# Altium PCB 转接板.PcbDoc
Units mil, origin at the board's own origin, x right, y up, seen from the top; angles counter-clockwise.
Board outline 2519.69 x 2440.94 mil, 2 copper layers (Top Layer, Bottom Layer); 36 components, 45 nets, 130 pads, 10 vias.
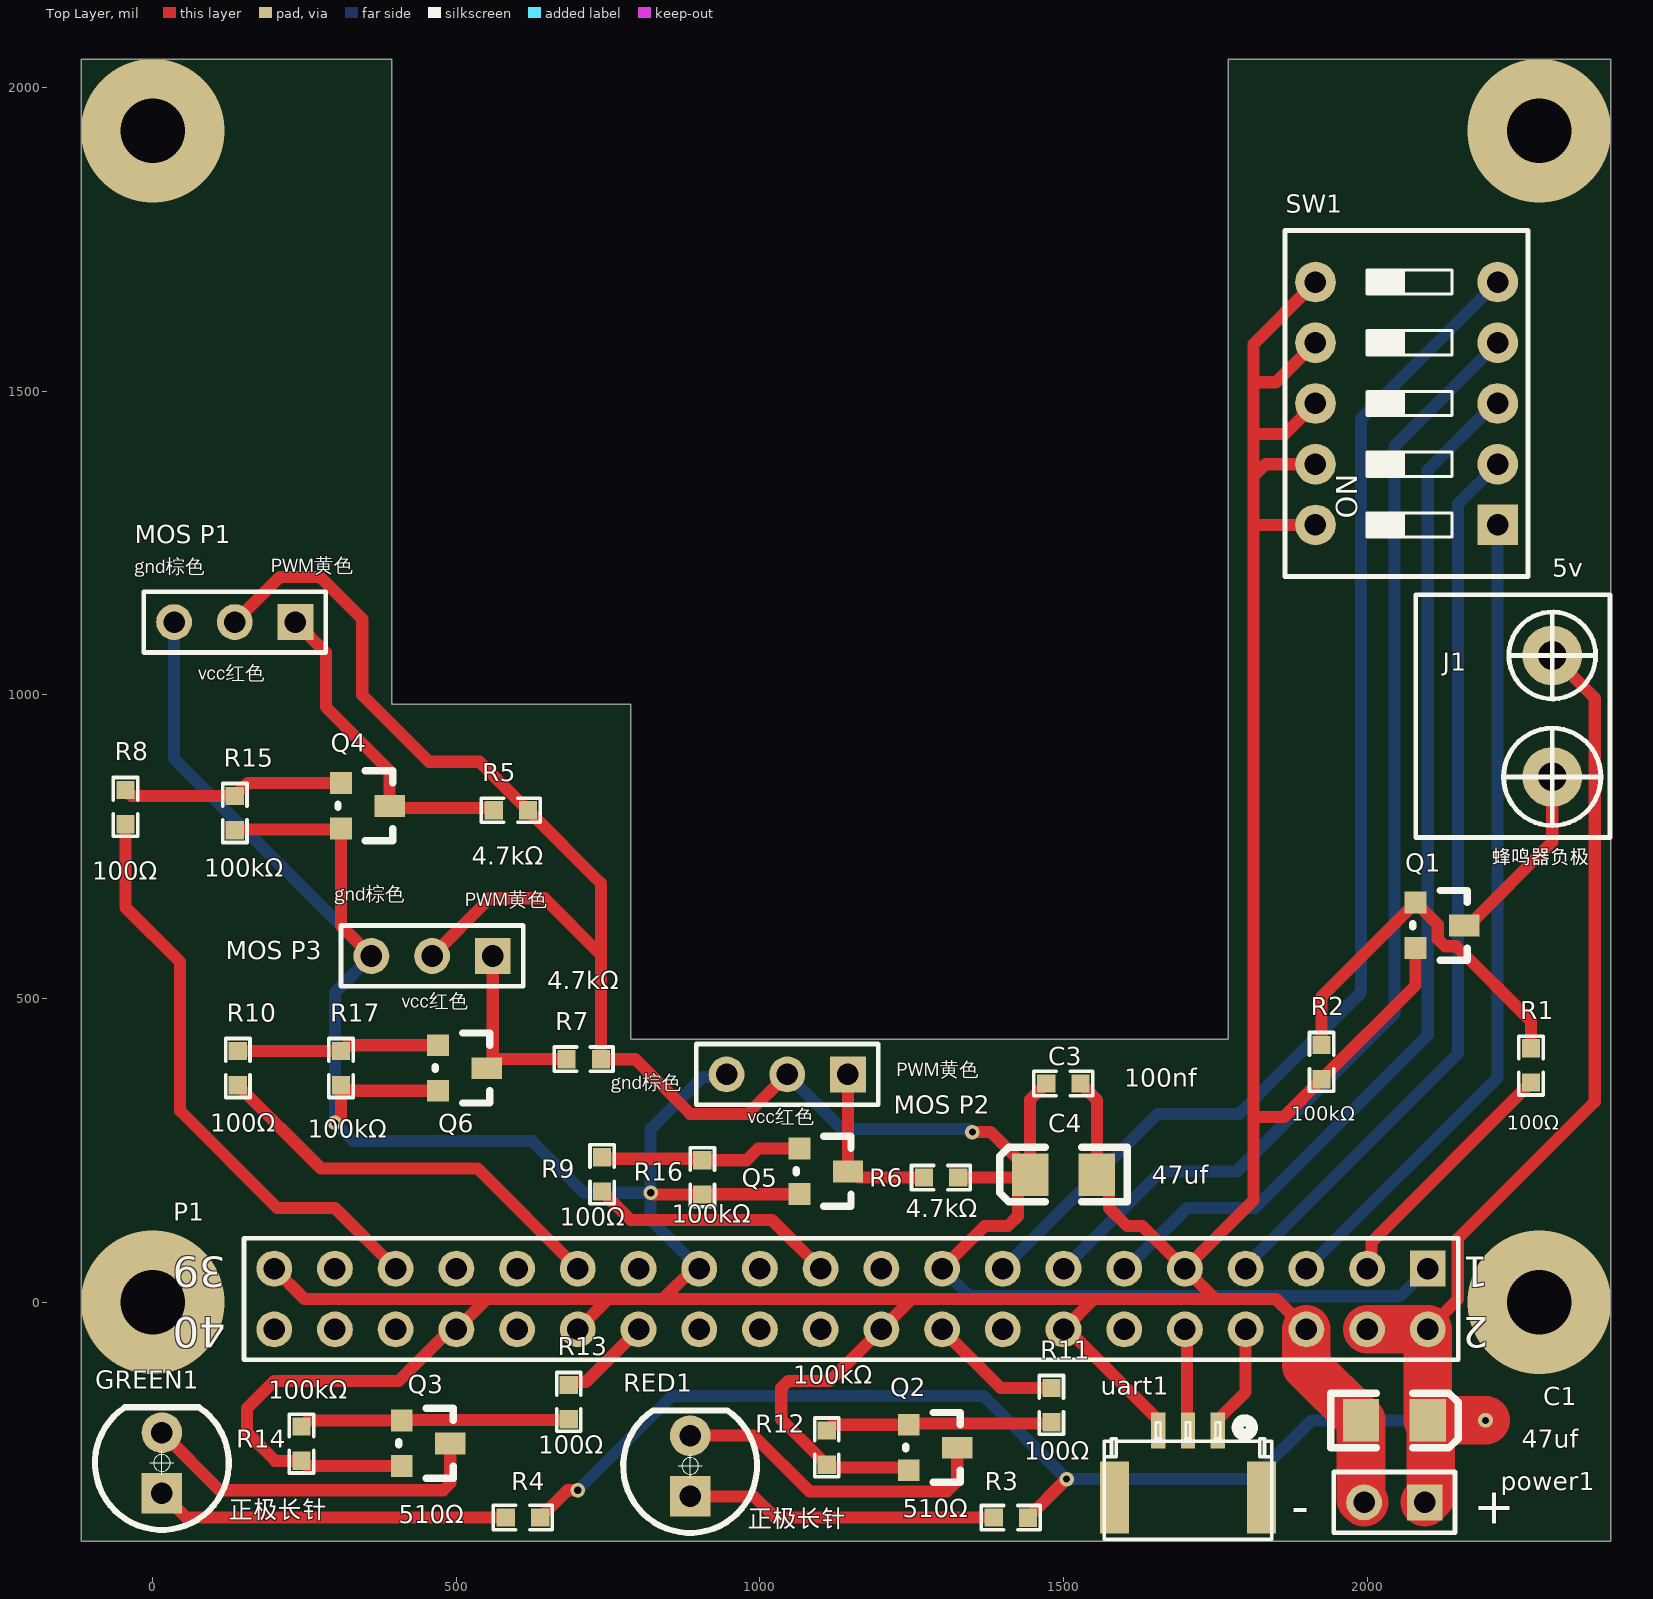
[diagram p0: Top Layer view]
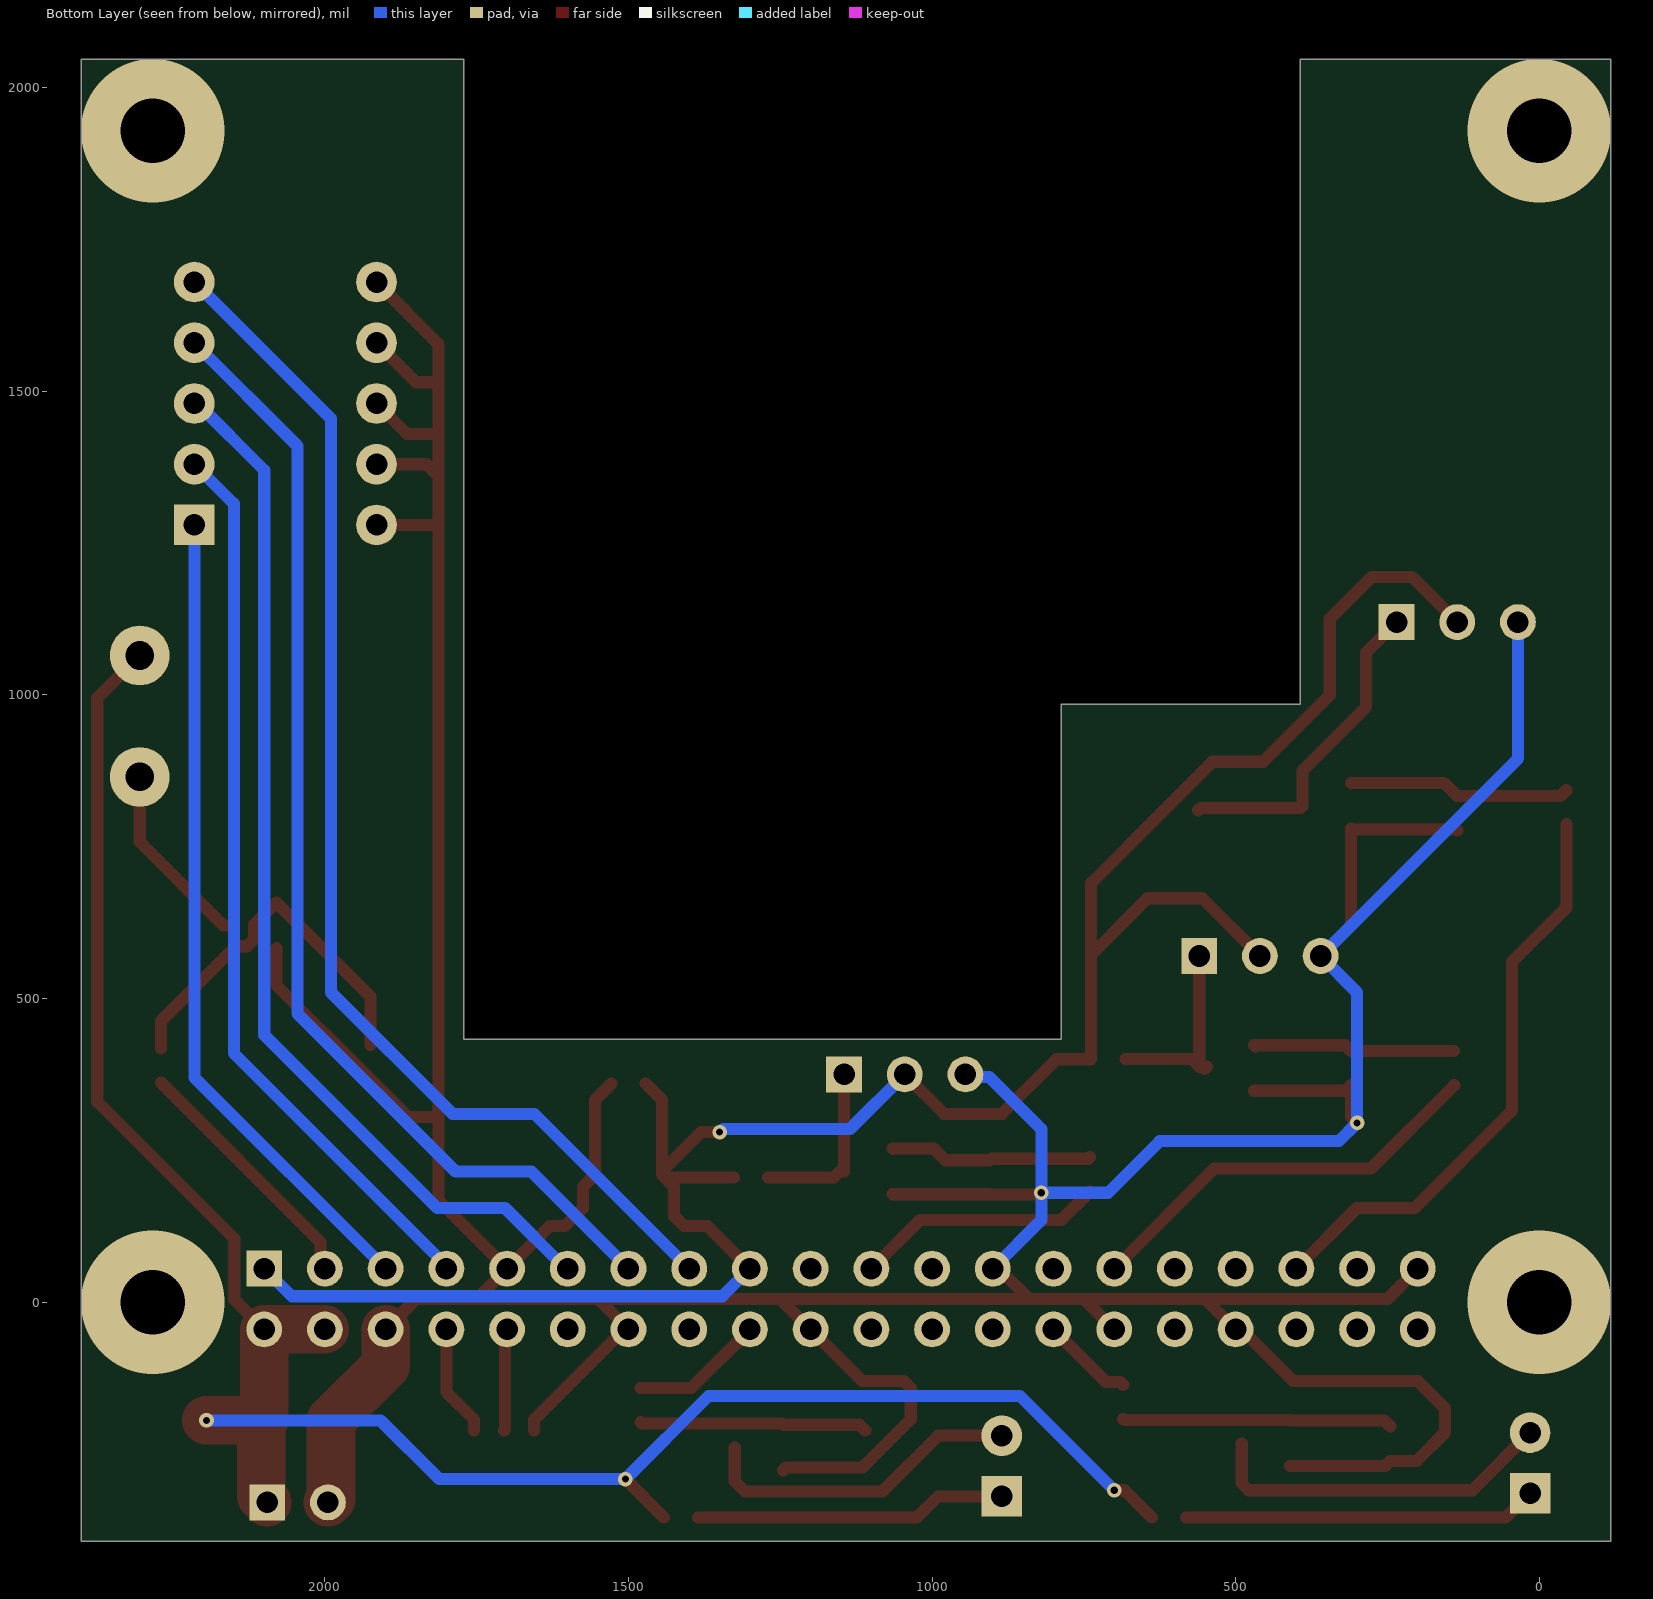
[diagram p1: Bottom Layer view, seen from below]

## Layer stack, top to bottom
Top Solder: solder mask 0.4, Solder Resist, Dk 3.5
Top Layer: signal copper 1.4
Dielectric 1: dielectric 12.6, FR-4, Dk 4.8
Bottom Layer: signal copper 1.4
Bottom Solder: solder mask 0.4, Solder Resist, Dk 3.5

## Board outline
-118.11,-393.7 -118.11,2047.24 393.7,2047.24 393.7,984.25 787.4,984.25 787.4,433.07 1771.65,433.07 1771.65,2047.24 2401.57,2047.24 2401.57,-393.7

## Design rules (kind name [scope] priority, off if disabled: settings)
Clearance [All] p1: gap=6 ignorepadtopadclearanceinfootprint=TRUE
PolygonConnect [All] p1: connectstyle=Relief reliefconductorwidth=10 reliefentries=4 polygonreliefangle="90 Angle" airgapwidth=10
RoutingVias [All] p1: holewidth=12 width=24 viastyle="Through Hole" minholewidth=12 minwidth=24 maxholewidth=12 maxwidth=24
SolderMaskExpansion [All] p1: expansion=4 istentingtop=FALSE
Width [All] p1: maxlimit=80 minlimit=10 preferedwidth=20
30 further rules are at their usual default settings.

## Components (designator, comment, footprint, x,y, rotation, side; value= is the part's Value field where it differs from the comment)
C1 "47uF" 3216 2060,-195 r0 top
C3 "100nF" 0603P 1500,360 r180 top
C4 "47uF" 3216 1485,210 r180 top
GREEN1 "LED?" "LED 5MM-G" 15,-265 r90 top
J1 "SIP-2" 5.08接线端子2P 2305,1065 r270 top
"MOS P1" "Header 3" HDR1X3 235,1120 r180 top
"MOS P2" "Header 3" HDR1X3 1145,375 r180 top
"MOS P3" "Header 3" HDR1X3 560,570 r180 top
P1 "Header 20X2" HDR2X20 2100,55 r180 top
power1 "Battery" HDR1X2 2095,-330 r180 top
Q1 "SI2302 SOT23" SOT-23 2080,658 r270 top
Q2 "SI2302 SOT23" SOT-23 1245,-202 r270 top
Q3 "SI2302 SOT23" SOT-23 410,-195 r270 top
Q4 "SI2302 SOT23" SOT-23 310,855 r270 top
Q5 "SI2302 SOT23" SOT-23 1065,253 r270 top
Q6 "SI2302 SOT23" SOT-23 470,423 r270 top
R1 "100R" 0603P 2270,390 r270 top
R2 "100K" 0603P 1925,395 r90 top
R3 "510R" 0603P 1413.5,-355.06 r180 top
R4 "510R" 0603P 610,-355 r180 top
R5 "4.7k" 0603P 590,810 r180 top
R6 "4.7k" 0603P 1298.5,204.94 r180 top
R7 "4.7k" 0603P 710,400 r180 top
R8 "100R" 0603P -45,815 r90 top
R9 "100R" 0603P 740,210 r90 top
R10 "100R" 0603P 140,385 r90 top
R11 "100R" 0603P 1480,-170 r90 top
R12 "100K" 0603P 1110,-240 r90 top
R13 "100R" 0603P 685,-165 r90 top
R14 "100K" 0603P 244.94,-233.5 r90 top
R15 "100K" 0603P 135,805 r90 top
R16 "100K" 0603P 905,205 r90 top
R17 "100K" 0603P 310,385 r90 top
RED1 "LED?" "LED 5MM-R" 885,-270 r90 top
SW1 "5P" 拨码开关DIP-5P_G 2065,1480 r90 top
uart1 "Header 3" GH1.25-LS-3P 1705,-310 r0 top

## Footprints (in the part's own frame and the unit in brackets; to place one, negate y for a bottom-side part, rotate by r counter-clockwise, add the part's x,y. Pads: shape width x height; smd on the part's side, far side on the other; paste and mask are expansions set on the pad)
5.08接线端子2P [mm]
  round 2.5 hole 1.2: 1(0,0) 2(5.08,0)
  silkscreen extent -2.54,-5.72 7.62,2.41, body extent -2.46,-5.59 7.54,2.41, height 11
0603P [mil]
  rect 30x30 smd: 1(-28,0) 2(28.5,-0.06)
  silkscreen extent -48,-20 49,20
3216 [mil]
  rect 60x70 smd: 1(40,0) 2(-70,0)
  silkscreen extent -120,-45 90,45
GH1.25-LS-3P [mm] "A1257WR-S-3P"
  rect 1.2x3 smd: 0(-3.075,-0.3) 0(3.075,-0.3)
  rect 0.6x1.5 smd: 1(1.25,2.5) 2(0,2.5) 3(-1.25,2.5)
  silkscreen extent -3.5,-2.05 3.5,2.93, body extent -3.5,-2.15 3.5,2.25, height 4.2
HDR1X2 [mm] "Connector; Header; 2 Position"
  rect 1.5x1.5 hole 0.9: 1(0,0)
  round 1.5 hole 0.9: 2(2.54,0)
  silkscreen extent -1.27,-1.27 3.81,1.27
HDR1X3 [mm] "Connector; Header; 3 Position"
  rect 1.5x1.5 hole 0.9: 1(0,0)
  round 1.5 hole 0.9: 2(2.54,0) 3(5.08,0)
  silkscreen extent -1.27,-1.27 6.35,1.27
HDR2X20 [mm] "Connector; Header; 20x2 Position"
  rect 1.5x1.5 hole 0.9: 1(0,0)
  round 1.5 hole 0.9: 2(0,2.54) 3(2.54,0) 4(2.54,2.54) 5(5.08,0) 6(5.08,2.54) 7(7.62,0) 8(7.62,2.54) 9(10.16,0) 10(10.16,2.54) 11(12.7,0) 12(12.7,2.54) 13(15.24,0) 14(15.24,2.54) 15(17.78,0) 16(17.78,2.54) 17(20.32,0) 18(20.32,2.54) 19(22.86,0) 20(22.86,2.54) 21(25.4,0) 22(25.4,2.54) 23(27.94,0) 24(27.94,2.54) 25(30.48,0) 26(30.48,2.54) 27(33.02,0) 28(33.02,2.54) 29(35.56,0) 30(35.56,2.54) 31(38.1,0) 32(38.1,2.54) 33(40.64,0) 34(40.64,2.54) 35(43.18,0) 36(43.18,2.54) 37(45.72,0) 38(45.72,2.54) 39(48.26,0) 40(48.26,2.54)
  silkscreen extent -1.27,-1.27 49.53,3.81
"LED 5MM-G" [mm] "绿色5mm直插LED"
  rect 1.7x1.7 hole 0.9: 1(-1.27,0)
  round 1.7 hole 0.9: 2(1.27,0)
  silkscreen extent -2.8,-2.8 2.33,2.8, body extent -2.85,-2.85 2.45,2.85, height 8.75
"LED 5MM-R" [mm] "红色5mm直插LED"
  rect 1.7x1.7 hole 0.9: 1(-1.27,0)
  round 1.7 hole 0.9: 2(1.27,0)
  silkscreen extent -2.8,-2.8 2.33,2.8, body extent -2.85,-2.85 2.45,2.85, height 8.75
SOT-23 [mil]
  rect 36x36 smd: 1(0,0) 2(75,0)
  rect 36x50 smd: 3(38,80)
  silkscreen extent -20,-5 95,85
拨码开关DIP-5P_G [mm] "14.2*9.9*7mm"
  rect 1.7x1.7 hole 0.9: 1(-5.08,-3.81)
  round 1.7 hole 0.9: 2(-2.54,-3.81) 3(0,-3.81) 4(2.54,-3.81) 5(5.08,-3.81) 6(5.08,3.81) 7(2.54,3.81) 8(0,3.81) 9(-2.54,3.81) 10(-5.08,3.81)
  silkscreen extent -7.24,-5.08 7.24,5.08, body extent -7.13,-4.95 7.13,4.95, height 6.65

## Part data
C1 C4: library part CAP
C3: library part C
GREEN1 RED1: library part LED
"MOS P1" "MOS P2" "MOS P3" uart1: "Header, 3-Pin", LatestRevisionDate=17-Jul-2002, LatestRevisionNote="Re-released for DXP Platform.", Publisher="Altium Limited"
P1: "Header, 20-Pin, Dual row", LatestRevisionDate=17-Jul-2002, LatestRevisionNote="Re-released for DXP Platform.", Publisher="Altium Limited"
power1: library part "Header 2", "Header, 2-Pin", LatestRevisionDate=17-Jul-2002, LatestRevisionNote="Re-released for DXP Platform.", Publisher="Altium Limited"
Q1 Q2 Q3 Q4 Q5 Q6: library part NMOS
R1 R2 R3 R4 R5 R6 R7 R8 R9 R10 R11 R12 R13 R14 R15 R16 R17: library part R
SW1: library part 拨码开关5P

## Via types
v1: diameter 24, hole 12, Top Layer to Bottom Layer, tented both sides, 6 vias
v2: diameter 236.22, hole 106.3, Top Layer to Bottom Layer, tented both sides, 4 vias

## Nets (pads, with @x,y where several pads share a name; then routed paths per layer and width w, separated by ;. In a path a pad name is that pad's centre, name@x,y a point inside that pad or via, vN(x,y) a via of type N, cw(c..) or ccw(c..) an arc to the next point about the centre after c; other vN are vias at no path point)
+3V3: "MOS P1.2" "MOS P2.2" "MOS P3.2" C3.2 C4.1 P1.1 P1.17 R5.1 R6.1 R7.1 | length 3748.8
  Top Layer w20: 135,1120 209.22,1194.22 275.78,1194.22 345,1125 345,1000 455,890 538,890 R5.1 738,690 738,572 ; 460,570 555,665 645,665 738,572 ; 1045,375 980,310 885,310 795,400 R7.1 738,572 ; P1.17 1370,125 1408.28,125 1425,141.72 1425,190 C4.1@1439.94,204.94 ; R6.1 C4.1@1439.94,204.94 ; v1(1350,280) 1380,280 C4.1@1445,215 ; C3.2 1445,333.56 C4.1@1445,215 ; C4.1@1439.94,204.94 C4.1 C4.1@1445,215
  Bottom Layer w20: 1045,375 1135,285 1343.92,285 1348.92,280 v1(1350,280) ; P1.17 1345.53,9.47 2054.47,9.47 P1.1
+5V: C1.1 J1.1 P1.2 P1.4 power1.1 R3.1 R4.1 | length 3565.4
  Top Layer w20: R4.1 683,-310 v1(700,-310) ; R3.1 v1(1505,-291.56) ; P1.2 2149.35,4.35 2149.35,104.35 2375,330 2375,995 J1.1
  Top Layer w80: P1.4 P1.2 C1.1 ; power1.1 2105,-320 2105,-200 C1.1 ; v1(2195,-195) C1.1
  Bottom Layer w20: v1(700,-310) 700,-309.85 854.85,-155 1368.44,-155 v1(1505,-291.56) 1811.72,-291.56 1908.28,-195 v1(2195,-195)
BCM0: P1.27
BCM1: P1.28 R13.2 | length 152.8
  Top Layer w20: R13.2 690.06,-131.5 713.5,-131.5 P1.28
BCM2: P1.3 R1.2 | length 418.3
  Top Layer w20: P1.3 2007.47,62.47 2007.47,99.04 R1.2
BCM3: P1.5 SW1.1 | length 1355.5
  Bottom Layer w20: P1.5 2215,370 SW1.1
BCM4: P1.7 SW1.2 | length 1504
  Top Layer w20: SW1.2@2210,1385 SW1.2
  Bottom Layer w20: P1.7 1800,60 2150,410 2150,1315 SW1.2
BCM5: P1.29 R10.1 | length 685.1
  Top Layer w20: R10.1 277,220 535,220 P1.29
BCM6: P1.31
BCM7: P1.26
BCM8: P1.24
BCM9: P1.21 R9.1 | length 412.6
  Top Layer w20: R9.1 787,135 1020,135 P1.21
BCM10: P1.19
BCM11: P1.23
BCM12: P1.32
BCM13: P1.33
BCM14: P1.8 uart1.1 | length 185.5
  Top Layer w20: uart1.1 1754.21,-193.86 1800,-148.07 P1.8
BCM15: P1.10 uart1.2 | length 168.6
  Top Layer w20: P1.10 1703.19,-48.19 1703.19,-209.76 uart1.2
BCM16: P1.36
BCM17: P1.11 SW1.3 | length 1750
  Bottom Layer w20: P1.11 1603.4,55 1703.4,155 1815,155 2100,440 2100,1370 2210,1480 SW1.3
BCM18: P1.12
BCM19: P1.35 R8.1 | length 972
  Top Layer w20: R8.1 -45,650 45,560 45,315 205,155 300,155 P1.35
BCM20: P1.38
BCM21: P1.40
BCM22: P1.15 SW1.5 | length 2041.7
  Bottom Layer w20: P1.15 1655,310 1790,310 1990,510 1990,1455 SW1.5
BCM23: P1.16
BCM24: P1.18 R11.2 | length 220
  Top Layer w20: P1.18 1396.5,-141.5 R11.2
BCM25: P1.22
BCM26: P1.37 | length 10.6
  Top Layer w20: P1.37 P1.37@300,65.57
BCM27: P1.13 SW1.4 | length 1894.4
  Bottom Layer w20: P1.13 1660,215 1785,215 2045,475 2045,1410 SW1.4
GND: "MOS P1.3" "MOS P2.3" "MOS P3.3" C1.2 C3.1 C4.2 P1.6 P1.9 P1.14 P1.20 P1.25 P1.30 P1.34 P1.39 power1.2 Q1.2 Q2.2 Q3.2 Q4.2 Q5.2 Q6.2 R2.1 R12.1 R14.1 R15.1 R16.1 R17.1 SW1.6 SW1.7 SW1.8 SW1.9 SW1.10 uart1.3 | length 9802.1
  Top Layer w20: R15.1 136.5,778.5 308.5,778.5 Q4.2 310,620 360,570 ; P1.39 250,5 550,5 ; v1(300,295) 310,305 R17.1 319,348 Q6.2 ; Q3.2 253.44,-270 R14.1 201.5,-261.5 155,-215 155,-175 200,-130 405,-130 490,-45 P1.34 550,5 ; P1.30 750,5 ; v1(820,180) 823,177 R16.1 905.5,177.5 1064.5,177.5 Q5.2 ; P1.25 890,55 840,5 ; Q2.2 1240.5,-272.5 1114.5,-272.5 R12.1 1035,-193 1035,-141.72 1046.72,-130 1115,-130 P1.20 1250,5 ; C3.1 1555,333 C4.2 1575,190 1575,155 1605,125 1630,125 P1.9 ; uart1.3 1655.79,-193.86 1506.93,-45 P1.14 1550,5 ; P1.6 1850,5 1750,5 ; SW1.10 1812.72,1280 ; SW1.9 1832.72,1380 1812.72,1360 ; SW1.8 1865,1430 1812.72,1430 ; SW1.7 1850,1515 1812.72,1515 ; SW1.6 1812.72,1577.72 1812.72,1515 ; Q1.2 2080,522 R2.1 1863,305 1812.72,305 ; 550,5 750,5 ; 750,5 840,5 ; 840,5 1250,5 ; 1250,5 1550,5 ; 1550,5 1750,5 ; P1.9 1750,5 ; P1.9 1812.72,167.72 1812.72,305 ; 1812.72,305 1812.72,1280 ; 1812.72,1280 1812.72,1360 ; 1812.72,1360 1812.72,1430 ; 1812.72,1430 1812.72,1515
  Top Layer w80: P1.6 1900,-105 C1.2 1990,-325 power1.2
  Bottom Layer w20: 35,1120 35,895 360,570 300,510 v1(300,295) 330,265 625,265 710,180 v1(820,180) ; P1.25 820,135 v1(820,180) ; 945,375 940.41,370.41 905.41,370.41 820,285 v1(820,180)
NetGREEN1_1: GREEN1.1 R4.2 | length 583
  Top Layer w20: GREEN1.1 54.94,-354.94 R4.2
NetGREEN1_2: GREEN1.2 Q3.3 | length 584.5
  Top Layer w20: GREEN1.2 110,-310 478.28,-310 490,-298.28 Q3.3
NetJ1_2: J1.2 Q1.3 | length 309.2
  Top Layer w20: Q1.3 2167,620 2305,758 J1.2
"NetMOS P1_1": "MOS P1.1" Q4.3 R5.2 | length 541.6
  Top Layer w20: 235,1120 285,1070 285,980 390,875 Q4.3 393.47,813.53 558.03,813.53 R5.2
"NetMOS P2_1": "MOS P2.1" Q5.3 R6.2 | length 289.2
  Top Layer w20: 1145,375 Q5.3 1152,215 1162,205 R6.2
"NetMOS P3_1": "MOS P3.1" Q6.3 R7.2 | length 333.1
  Top Layer w20: Q6.3@547.5,387.5 Q6.3@554.5,387.5 ; Q6.3 552,385 Q6.3@554.5,387.5 ; 562.5,567.5 560,570 560,393 Q6.3@554.5,387.5 ; R7.2 572.06,400.06 559.5,387.5 Q6.3@554.5,387.5
NetQ1_1: Q1.1 R1.1 R2.2 | length 628.3
  Top Layer w20: R2.2 1925.06,503.06 Q1.1 2116.28,621.72 2116.28,598.09 2128.37,586 2147,586 2270,463 R1.1
NetQ2_1: Q2.1 R11.1 R12.2 | length 375.5
  Top Layer w20: R12.2 1119.56,-202 Q2.1 1247,-200 1478,-200 R11.1
NetQ2_3: Q2.3 RED1.2 | length 539.9
  Top Layer w20: RED1.2 990,-220 1081.72,-311.72 1308.28,-311.72 1325,-295 Q2.3
NetQ3_1: Q3.1 R13.1 R14.2 | length 445
  Top Layer w20: R14.2 255,-195 Q3.1 411,-194 684,-194 R13.1
NetQ4_1: Q4.1 R8.2 R15.2 | length 368
  Top Layer w20: R8.2 -34.94,833.5 R15.2 156.56,855 Q4.1
NetQ5_1: Q5.1 R9.2 R16.2 | length 335.8
  Top Layer w20: R9.2 742.56,236 902.56,236 R16.2 977.78,233.5 997.28,253 Q5.1 Q5.1@1064.5,252.5
NetQ6_1: Q6.1 R10.2 R17.2 | length 337.1
  Top Layer w20: R10.2 R17.2 319.56,423 Q6.1 Q6.1@467.75,420.75
NetR3_2: R3.2 RED1.1 | length 514.5
  Top Layer w20: RED1.1 990,-320 1025,-355 R3.2
pads on no net: uart1.0
copper on no net:
  other v2: 0,0 2283.46,0 0,1929.13 2283.46,1929.13

## Silkscreen, mask and mechanical layers (free items; w line width, h text height)
Top Overlay:
  text "5v" at 2305,1195 h30
  text "PWM黄色" at 195,1193.63 h40
  text "gnd棕色" at -30,1192.51 h40
  text "vcc红色" at 75,1016.66 h40
  text "蜂鸣器负极" at 2205,713.63 h40
  text "4.7kΩ" at 525,710 h50
  text "100kΩ" at 85,690.55 h50
  text "100Ω" at -100,685.55 h50
  text "gnd棕色" at 300,652.51 h40
  text "PWM黄色" at 515,643.63 h40
  text "4.7kΩ" at 650,505 h50
  text "vcc红色" at 410,476.66 h40
  text "PWM黄色" at 1225,363.63 h40
  text "100nf" at 1600,355 h30
  text "gnd棕色" at 755,342.51 h40
  text "100kΩ" at 1875,290.44 h40
  text "vcc红色" at 980,286.66 h40
  text "100Ω" at 2230,275.44 h40
  text "100Ω" at 95,270.55 h50
  text "100kΩ" at 255,260.55 h50
  text "47uf" at 1645,195 h30
  text "4.7kΩ" at 1240,130 h50
  text "100kΩ" at 855,120.55 h50
  text "100Ω" at 670,115.55 h50
  text "100kΩ" at 1055,-144.45 h50
  text "100kΩ" at 190,-169.45 h50
  text "47uf" at 2255,-240 h30
  text "100Ω" at 635,-259.45 h50
  text "100Ω" at 1435,-269.45 h50
  text "510Ω" at 1235,-364.45 h50
  text "-" at 1875,-364.99 h60
  text "+" at 2175,-365 h60
  text "正极长针" at 125.05,-365.66 h50
  text "510Ω" at 405,-374.45 h50
  text "正极长针" at 980.05,-380.66 h50
Mechanical 1:
  the board outline again, w10

## Text inside footprints (layer, text, board x,y; h text height)
P1: Top Overlay "1" at 2200,75 h50 r180; Top Overlay "2" at 2200,-25 h50 r180; Top Overlay "40" at 120,-25 h50 r180; Top Overlay "39" at 120,75 h50 r180
SW1: Top Overlay "ON" at 1995,1290 h60 r90